# Altium PCB Fly-Balance.PcbDoc (part 1 of 2)
Units mil, origin at the board's own origin, x right, y up, seen from the top; angles counter-clockwise.
Board outline 1574.8 x 1574.8 mil, 2 copper layers (Top Layer, Bottom Layer); 114 components, 74 nets, 393 pads, 405 vias.
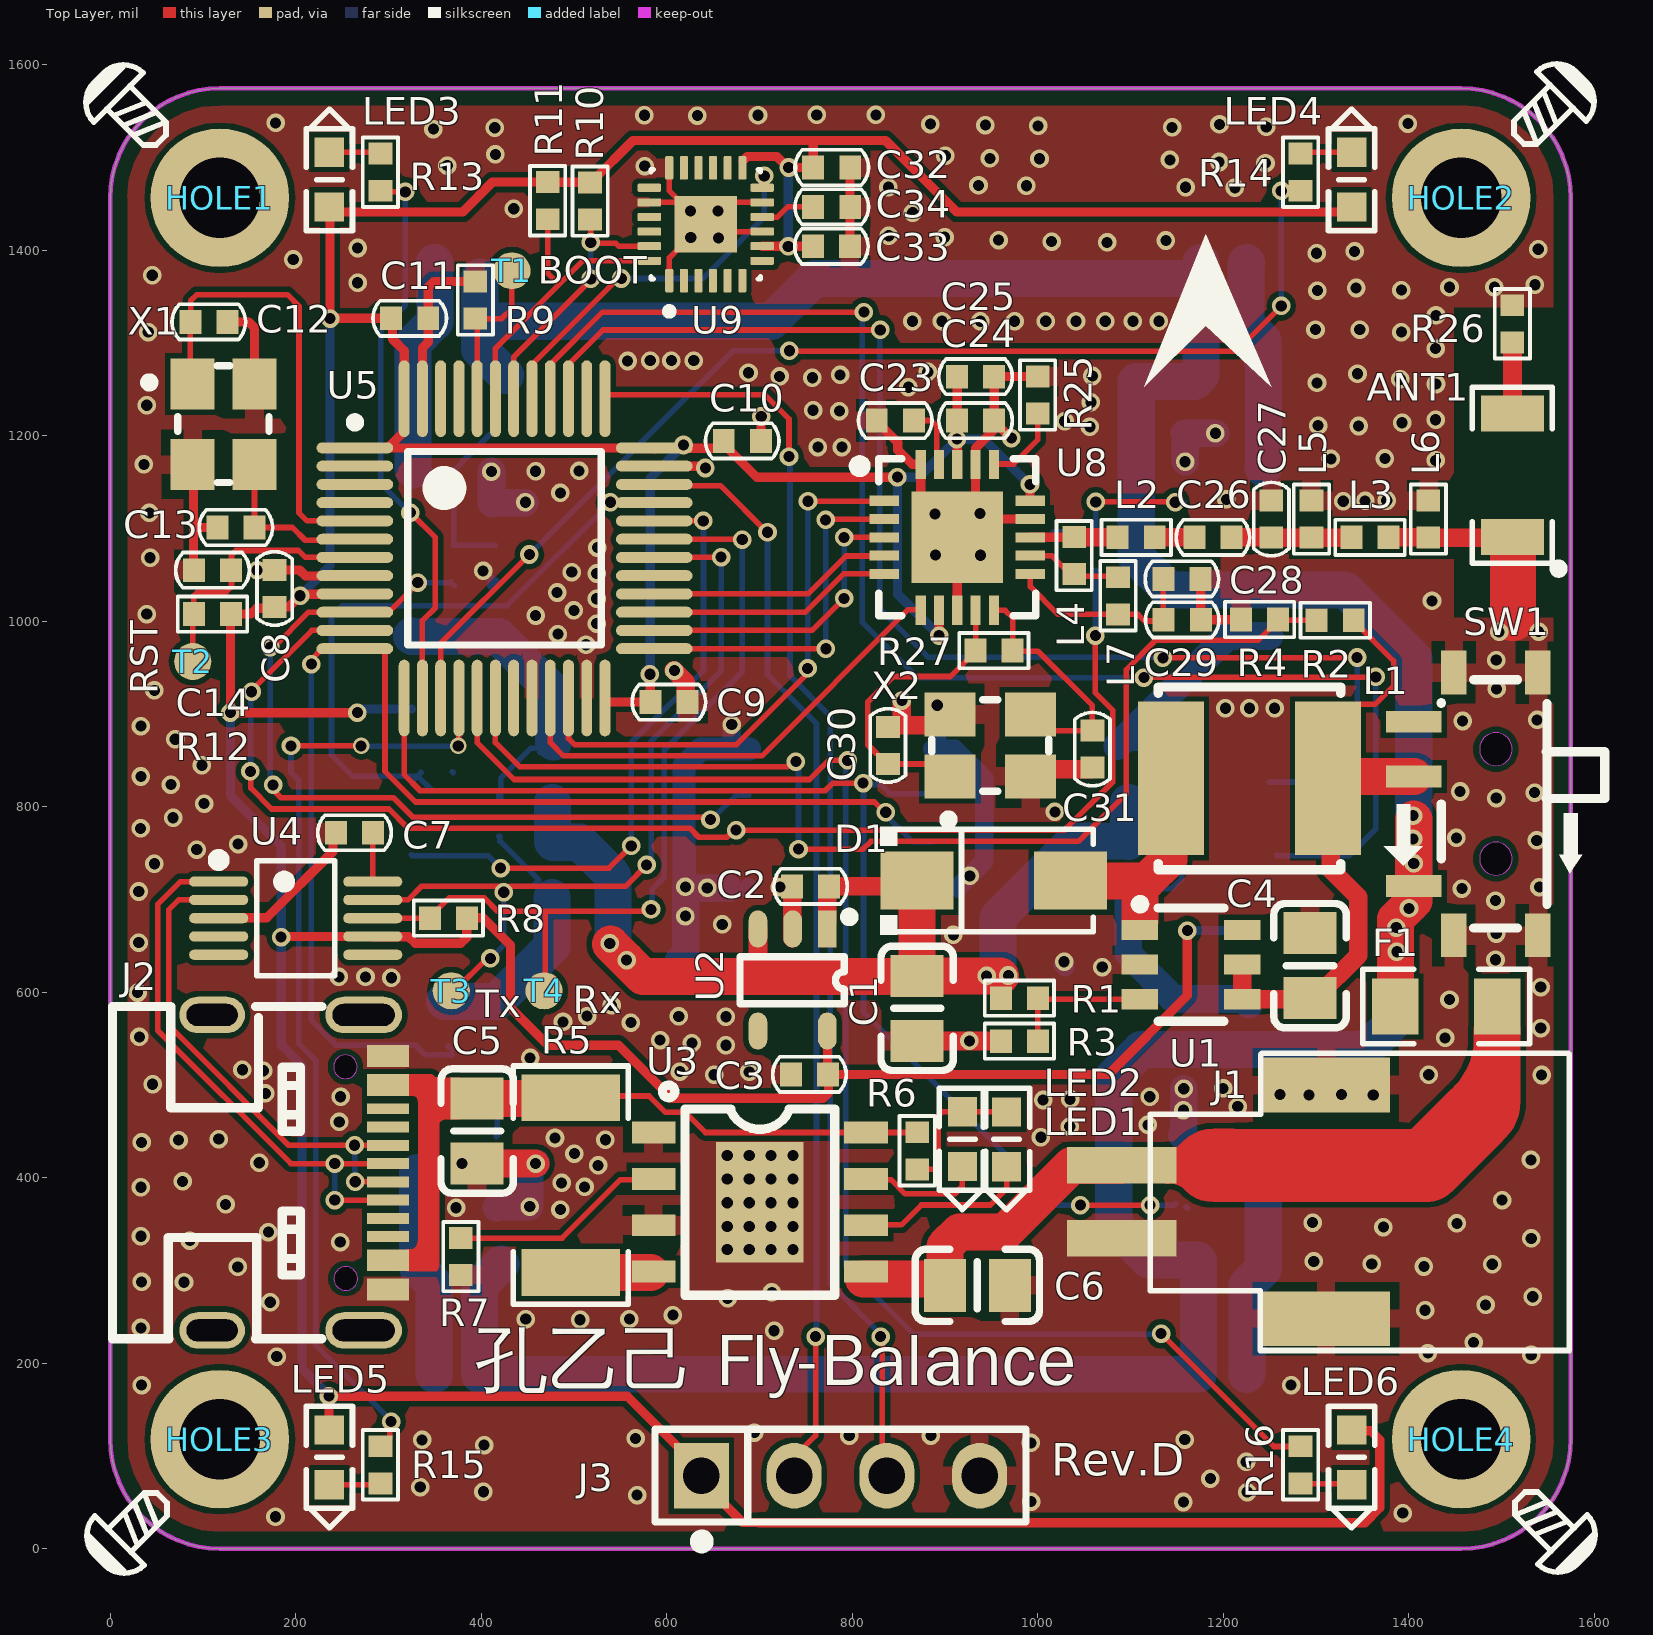
[diagram p0: Top Layer view]
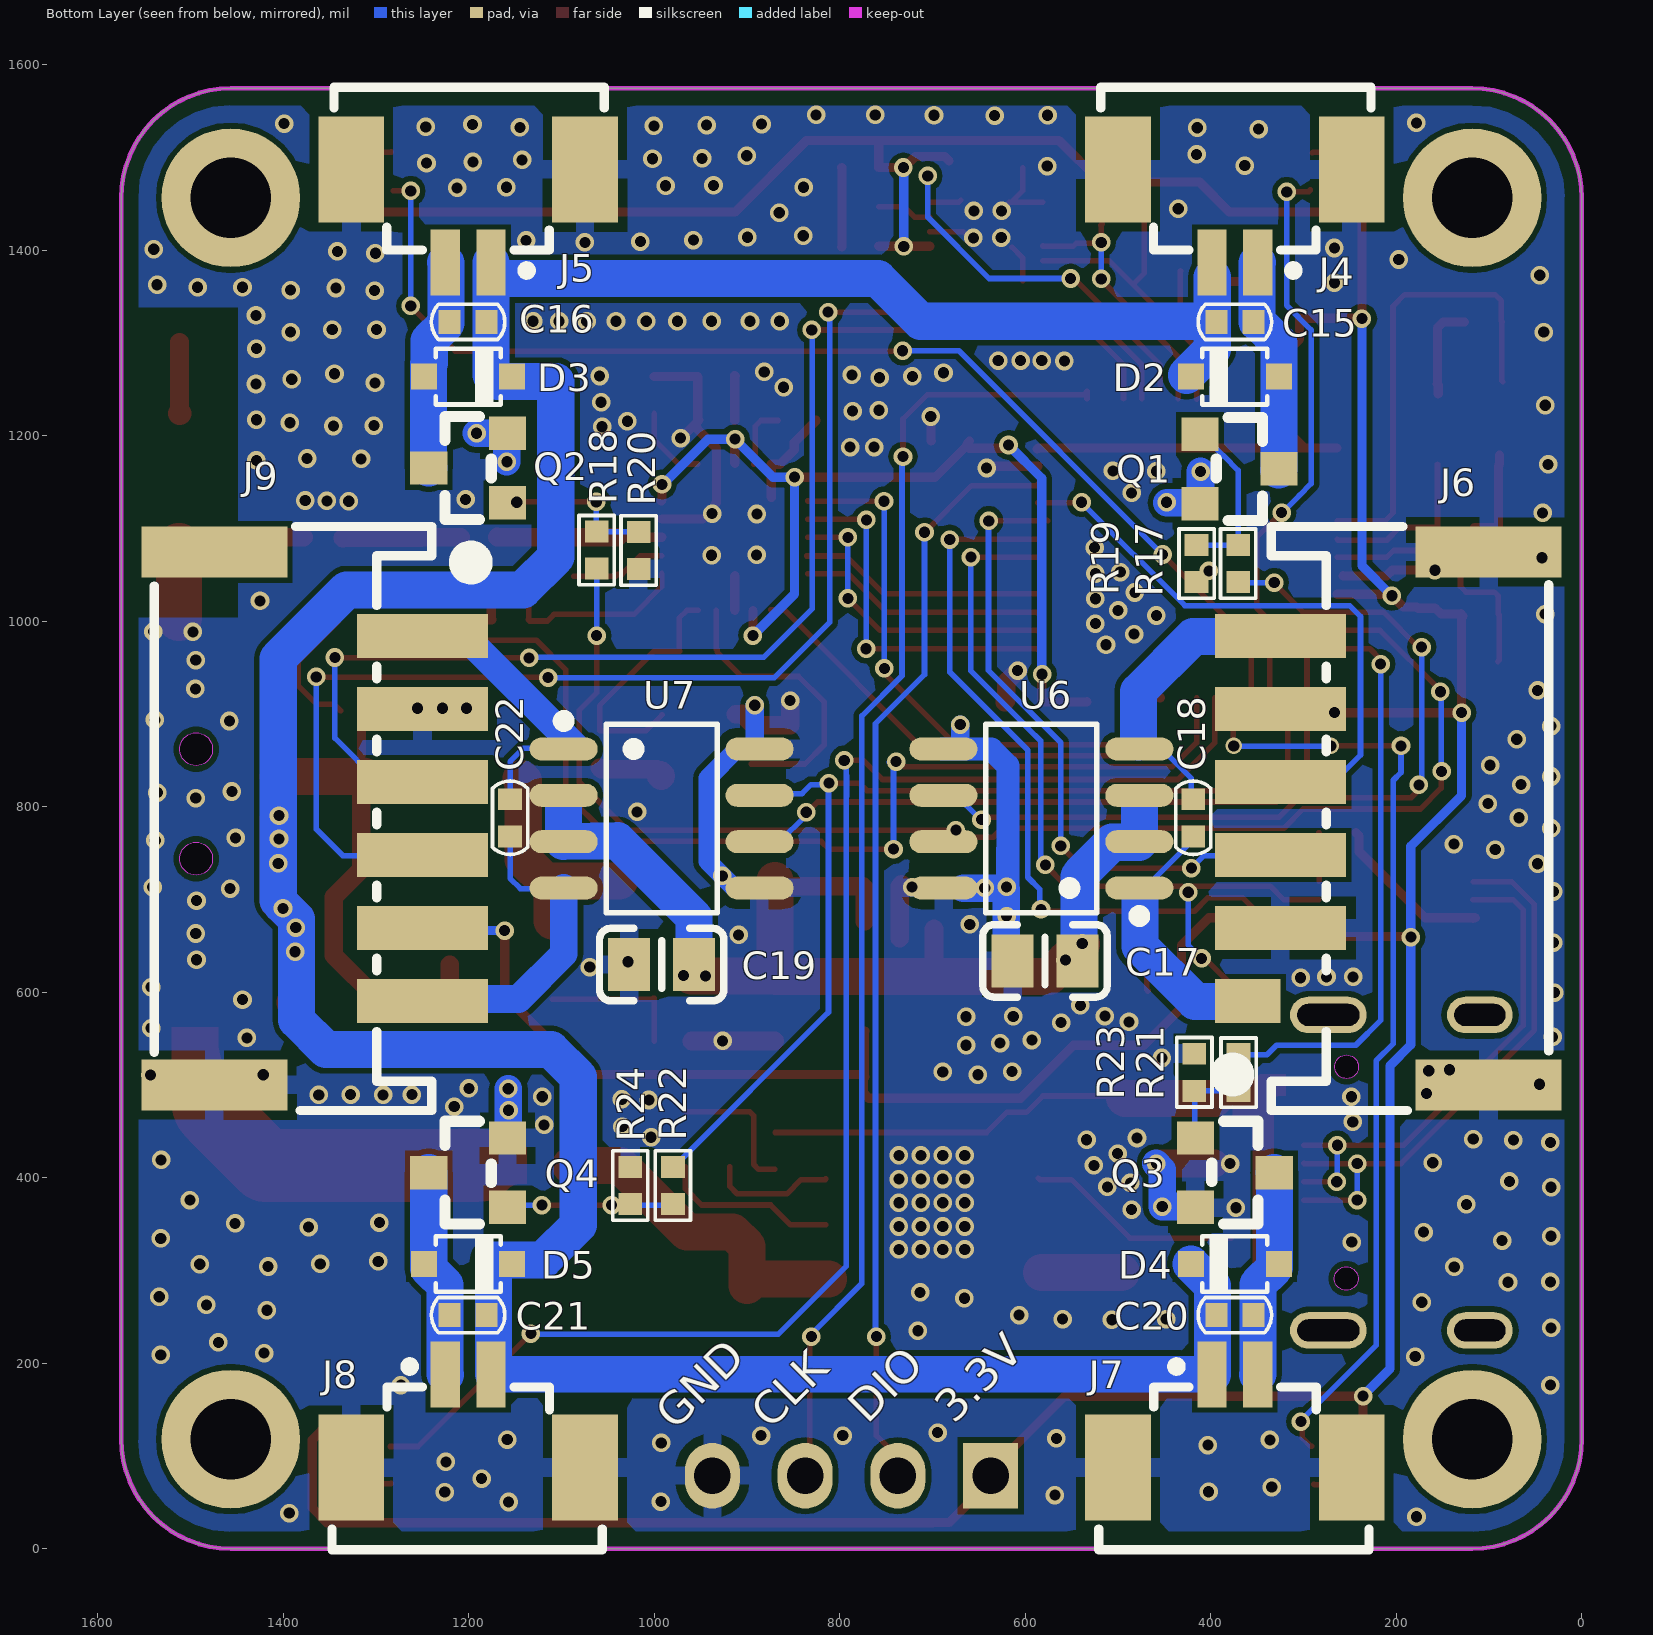
[diagram p1: Bottom Layer view, seen from below]

## Layer stack, top to bottom
Top Solder: solder mask 0.4, Solder Resist, Dk 3.5
Top Layer: signal copper 1.4
Dielectric 1: dielectric 12.6, FR-4, Dk 4.8
Bottom Layer: signal copper 1.4
Bottom Solder: solder mask 0.4, Solder Resist, Dk 3.5

## Board outline
0,118.11 ccw(c118.11,118.11) 118.11,0 1456.69,0 ccw(c1456.69,118.11) 1574.8,118.11 1574.8,1456.69 ccw(c1456.69,1456.69) 1456.69,1574.8 118.11,1574.8 ccw(c118.11,1456.69) 0,1456.69

## Design rules (kind name [scope] priority, off if disabled: settings)
Clearance Keep-Out [OnLayer('Keep-Out Layer')] p1: gap=15.75 ignorepadtopadclearanceinfootprint=FALSE except(0: Arc-Hole Track-Hole SMDPad-Hole THPad-Hole Via-Hole Fill-Hole Poly-Hole Region-Hole Text-Hole)
Clearance [All] p2: gap=6 ignorepadtopadclearanceinfootprint=FALSE except(0: Arc-Hole Track-Hole SMDPad-Hole THPad-Hole Via-Hole Fill-Hole Poly-Hole Region-Hole Text-Hole)
ComponentClearance [All] p1: gap=0 collisioncheckmode=3 verticalgap=0 showdistances=FALSE
HoleSize [All] p1: absolutevalues=TRUE maxlimit=200 minlimit=1 maxpercent=80.000 minpercent=20.000
MinimumSolderMaskSliver [All] p1: minsoldermaskwidth=0
PolygonConnect PolygonConnect_2 [HasPad('J2-A1B12') or HasPad('J2-B1A12') or HasPad('J1-1') or HasPad('R26-2') or HasPad('U3-9') or IsVia] p1: connectstyle=Direct reliefconductorwidth=10 reliefentries=4 polygonreliefangle="90 Angle" airgapwidth=10
PolygonConnect PolygonConnect_1 [All] p2: connectstyle=Relief reliefconductorwidth=20 reliefentries=4 polygonreliefangle="90 Angle" airgapwidth=10
RoutingVias [All] p1: holewidth=12 width=20 viastyle="Through Hole" minholewidth=12 minwidth=16 maxholewidth=28 maxwidth=50
SilkToSilkClearance [All] p1: silktosilkclearance=0
SilkToSolderMaskClearance [IsPad] p1: minsilkscreentomaskgap=0 clearancetoexposedcopper=TRUE
SolderMaskExpansion [All] p1: expansion=4
Width [All] p1: maxlimit=100 minlimit=6 preferedwidth=6
25 further rules are at their usual default settings.

## Classes and differential pairs
component class U_05_MPU6500: C32 C33 C34 U9
component class U_06_NRF24L01: ANT1 C23 C24 C25 C26 C27 C28 C29 C30 C31 L2 L3 L4 L5 L6 L7 R25 R26 R27 U8 X2
component class U_04_Motor_Driver: C15 C16 C17 C18 C19 C20 C21 C22 D2 D3 D4 D5 J4 J5 J6 J7 J8 J9 Q1 Q2 Q3 Q4 R17 R18 R19 R20 R21 R22 R23 R24 U6 U7
component class U_03_MCU: C8 C9 C10 C11 C12 C13 C14 J3 LED3 LED4 LED5 LED6 R9 R10 R11 R12 R13 R14 R15 R16 T1 T2 T3 T4 U5 X1
component class U_02_Power: C1 C2 C3 C4 C5 C6 C7 D1 F1 J1 J2 L1 LED1 LED2 R1 R2 R3 R4 R5 R6 R7 R8 SW1 U1 U2 U3 U4
component class 01_Fly-Balance: HOLE1 HOLE2 HOLE3 HOLE4

## Components (designator, comment, footprint, x,y, rotation, side; value= is the part's Value field where it differs from the comment)
ANT1 "CrossAir Antenna" ANT-SMD_L3.1-W1.6 1511.81,1157.48 r90 top
C1 "22uF" 0805C 870.08,582.68 r270 top
C2 "104" 0402C 755.12,714.17 r180 top
C3 "1uF" 0402C 753.94,511.42 r180 top
C4 "22uF" 0805C 1293.7,628.74 r90 top
C5 "10uF" 0805C 395.67,450.39 r270 top
C6 "10uF" 0805C 935,284 r0 top
C7 "104" 0402C 263.39,772.05 r180 top
C8 "104" 0402C 177.17,1035.43 r270 top
C9 "104" 0402C 602.36,912.99 r180 top
C10 "104" 0402C 681.5,1194.49 r180 top
C11 "104" 0402C 322.83,1326.77 r180 top
C12 "20pF" 0402C 106.3,1322.83 r180 top
C13 "20pF" 0402C 135.43,1101.18 r0 top
C14 "104" 0402C 110.24,1055.12 r0 top
C15 "104" 0402C 374.02,1322.83 r180 bottom
C16 "104" 0402C 1200.79,1322.83 r0 bottom
C17 "22uF" 0805C 578.74,633.86 r0 bottom
C18 "104" 0402C 418.9,788.19 r270 bottom
C19 "22uF" 0805C 992.13,629.92 r0 bottom
C20 "104" 0402C 374.02,251.97 r180 bottom
C21 "104" 0402C 1200.79,251.97 r0 bottom
C22 "104" 0402C 1155.51,788.19 r90 bottom
C23 "33nF" 0402C 846.46,1216.54 r0 top
C24 "10nF" 0402C 933.07,1216.54 r0 top
C25 "1nF" 0402C 933.07,1263.78 r0 top
C26 "1.5pF" 0402C 1188.98,1090.55 r0 top
C27 "1.0pF" 0402C 1251.97,1110.24 r270 top
C28 "2.2nF" 0402C 1155.51,1045.67 r0 top
C29 "4.7pF" 0402C 1155.91,1001.57 r0 top
C30 "20pF" 0402C 838.58,866.14 r270 top
C31 "20pF" 0402C 1059.06,862.2 r90 top
C32 "104" 0402C 777.95,1489.37 r0 top
C33 "10nF" 0402C 777.56,1404.33 r180 top
C34 "104" 0402C 777.95,1446.85 r0 top
D1 "SS24" SMA_L4.3-W2.5-LS5.0-RD 952.76,720.47 r180 top
D2 "1N4001" SOD-323 374.02,1263.78 r0 bottom
D3 "1N4001" SOD-323 1200.79,1263.78 r180 bottom
D4 "1N4001" SOD-323 374.02,307.09 r0 bottom
D5 "1N4001" SOD-323 1200.79,307.09 r180 bottom
F1 "5A" 1206R 1440.55,584.65 r0 top
HOLE1 "螺丝孔" HOLE-2.2 118.11,1456.69 r90 top
HOLE2 "螺丝孔" HOLE-2.2 1456.69,1456.69 r0 top
HOLE3 "螺丝孔" HOLE-2.2 118.11,118.11 r180 top
HOLE4 "螺丝孔" HOLE-2.2 1456.69,118.11 r270 top
J1 "Battery" 51005母座 1200.79,374.02 r90 top
J2 "Type-C" USB-C-SMD_TYPE-C-16P-1 204.72,405.51 r270 top
J3 "CON4" SIP-4-2.54 787.4,78.74 r0 top
J4 "FLY_MOT" CONN-SMD_2P-P1.25 374.02,1437.01 r0 bottom
J5 "FLY_MOT" CONN-SMD_2P-P1.25 1200.79,1437.01 r0 bottom
J6 "BAL_MOT" CONN-SMD_6P-P2.00_DEALON_PH-6PWB#1 212.6,787.4 r90 bottom
J7 "FLY_MOT" CONN-SMD_2P-P1.25 374.02,137.8 r180 bottom
J8 "FLY_MOT" CONN-SMD_2P-P1.25 1200.79,137.8 r180 bottom
J9 "BAL_MOT" CONN-SMD_6P-P2.00_DEALON_PH-6PWB#2 1362.2,787.4 r270 bottom
L1 "4.7uH" IND-SMD_L5.0-W5.0_FNR50XXS 1228.35,830.71 r180 top
L2 "3.9nH" 0402R 1106.3,1090.55 r0 top
L3 "3nH" 0402R 1358.27,1090.55 r0 top
L4 "8.2nH" 0402R 1039.37,1070.87 r90 top
L5 "NC" 0402R 1295.28,1110.24 r270 top
L6 "NC" 0402R 1421.26,1110.24 r270 top
L7 "2.7nH" 0402R 1086.61,1027.56 r270 top
LED1 "Green" LED-0603 966.54,441.34 r270 top value=0603Red,SMD
LED2 "Red" LED-0603 918.9,441.73 r270 top value=0603Red,SMD
LED3 "Blue" LED-0603 236.22,1476.38 r90 top value=0603Red,SMD
LED4 "Blue" LED-0603 1338.58,1476.38 r90 top value=0603Red,SMD
LED5 "Blue" LED-0603 236.22,98.43 r270 top value=0603Red,SMD
LED6 "Blue" LED-0603 1338.58,98.43 r270 top value=0603Red,SMD
Q1 "SI2302" SOT-23 369.09,1164.37 r180 bottom
Q2 "SI2302" SOT-23 1200.79,1165.35 r0 bottom
Q3 "SI2302" SOT-23 374.02,405.51 r180 bottom
Q4 "SI2302" SOT-23 1200.79,405.51 r0 bottom
R1 "18k" 0402R 980.32,593.7 r180 top
R2 "3.6k" 0402R 1320.87,1001.18 r0 top
R3 "2k" 0402R 980.32,547.24 r0 top
R4 "10k" 0402R 1239.29,1001.97 r0 top
R5 "200mΩ/750mW" 2010R 496.46,392.13 r90 top
R6 "1k" 0402R 870.08,429.13 r90 top
R7 "1k" 0402R 377.95,314.96 r90 top
R8 "10k" 0402R 364.57,679.92 r0 top
R9 "10k" 0402R 393.7,1346.46 r90 top
R10 "4.7k" 0402R 517.32,1453.15 r90 top
R11 "4.7k" 0402R 471.65,1453.54 r90 top
R12 "10k" 0402R 110.24,1007.87 r0 top
R13 "200" 0402R 291.34,1484.25 r90 top
R14 "200" 0402R 1283.46,1484.25 r90 top
R15 "200" 0402R 291.34,90.55 r270 top
R16 "200" 0402R 1283.46,90.55 r270 top
R17 "22" 0402R 370.47,1062.2 r270 bottom
R18 "22" 0402R 1062.2,1076.77 r270 bottom
R19 "10k" 0402R 415.35,1062.2 r270 bottom
R20 "10k" 0402R 1016.93,1076.38 r270 bottom
R21 "22" 0402R 370.08,513.39 r90 bottom
R22 "22" 0402R 979.92,391.73 r90 bottom
R23 "10k" 0402R 417.72,513.78 r90 bottom
R24 "10k" 0402R 1025.98,391.73 r90 bottom
R25 "22k" 0402R 1000,1244.09 r270 top
R26 "0" 0402R 1511.81,1320.87 r90 top
R27 "1M" 0402R 952.76,968.5 r0 top
SW1 "MSK12C02" MSK12C02 1472.44,803.15 r90 top
T1 "BOOT" PAD-40#1 433.07,1377.95 r0 top
T2 "RST" PAD-40#2 90.55,956.69 r0 top
T3 "Tx" PAD-40#1 367.72,601.57 r0 top
T4 "Rx" PAD-40#1 467.72,601.57 r0 top
U1 "ME2159BM6G" SOT-23-6_L2.9-W1.6-P0.95-LS2.8-BR 1165.35,629.92 r0 top
U2 "XC6204B332MR" SOT-23-5 735.83,613.27 r180 top
U3 "TP4056" ESOP-8_L4.9-W3.9-P1.27-LS6.0-BL-EP 700.46,373.82 r0 top
U4 "CH340E" MSOP-10_L3.0-W3.0-P0.50-LS5.0-BL 200,679.92 r270 top
U5 "CH32F203C8T6" LQFP-48_7x7 425.2,1078.74 r0 top
U6 "L9110S" SOP-8_L4.9-W3.9-P1.27-LS6.0-BL 582.68,787.4 r0 bottom
U7 "L9110S" SOP-8_L4.9-W3.9-P1.27-LS6.0-BL 992.13,787.4 r180 bottom
U8 "NRF24L01" QFN-20_L4.0-W4.0-P0.50-BL-EP 913.39,1090.55 r0 top
U9 "MPU6500" QFN-24_L3.0-W3.0-P0.40-BL-EP 642.13,1428.15 r90 top
X1 "8MHz" OSCCC250X320X80-4N 122.05,1212.6 r90 top
X2 "16MHz" OSCCC250X320X80-4N 948.82,866.14 r180 top

## Footprints (in the part's own frame and the unit in brackets; to place one, negate y for a bottom-side part, rotate by r counter-clockwise, add the part's x,y. Pads: shape width x height; smd on the part's side, far side on the other; paste and mask are expansions set on the pad)
0402C [mm]
  rect 0.6x0.65 smd mask+0.025: 1(-0.508,0) 2(0.508,0)
  silkscreen extent -1.01,-0.48 1.01,0.48, body extent -0.51,-0.23 0.49,0.27, height 0.5
0402R [mm]
  rect 0.6x0.65 smd mask+0.025: 1(-0.508,0) 2(0.508,0)
  silkscreen extent -0.95,-0.48 0.95,0.48, body extent -0.47,-0.25 0.53,0.25, height 0.35
0805C [mm]
  rect 1.15x1.45 smd: 1(-0.889,0) 2(0.889,0)
  silkscreen extent -1.7,-0.99 1.7,0.99, body extent -1,-0.63 1,0.63, height 0.78
1206R [mil] "元件 长X宽=120X60mil"
  rect 50x60 smd: 1(-55,0) 2(55,0)
  silkscreen extent -90,-40 90,40, body extent -63,-31 63,31, height 24
2010R [mm]
  rect 1.283x2.7 smd mask+0.051: 1(-2.391,0) 2(2.391,0)
  silkscreen extent -3.26,-1.58 3.26,1.58
51005母座 [mm]
  rect 1.5x3.5 smd: 0(-3.2,-2.8) 0(3.2,-2.8)
  rect 1x3 smd: 1(-1,2.8) 2(1,2.8)
  silkscreen extent -4.07,-9.46 4.07,2.02
ANT-SMD_L3.1-W1.6 [mil]
  rect 38.7x68 smd mask+2: 1(-66.6,0) 2(66.6,0)
  silkscreen extent -106,-55 95,43
CONN-SMD_2P-P1.25 [mil]
  rect 70.9x114.2 smd mask+1.97: 0(-126,-50.2) 0(126,-50.2)
  rect 31.5x70.9 smd mask+1.97: 1(-24.6,50.2) 2(24.6,50.2)
  silkscreen extent -147,-139 145,64
CONN-SMD_6P-P2.00_DEALON_PH-6PWB#1 [mm]
  rect 1.2x1.8 smd mask+0.05: 1(-5,3.75)
  rect 1.2x3.6 smd mask+0.05: 2(-3,2.85) 3(-1,2.85) 4(1,2.85) 5(3,2.85) 6(5,2.85)
  rect 1.4x4 smd mask+0.05: 7(-7.3,-2.85) 8(7.3,-2.85)
  silkscreen extent -8,-4.5 8,4.45
CONN-SMD_6P-P2.00_DEALON_PH-6PWB#2 [mm]
  rect 1.2x3.6 smd mask+0.05: 1(-5,2.85) 2(-3,2.85) 3(-1,2.85) 4(1,2.85) 5(3,2.85) 6(5,2.85)
  rect 1.4x4 smd mask+0.05: 7(-7.3,-2.85) 8(7.3,-2.85)
  silkscreen extent -8,-4.5 8,4.45
ESOP-8_L4.9-W3.9-P1.27-LS6.0-BL-EP [mm]
  rect 1.2x0.6 smd mask+0.051: 1(-2.908,1.905) 2(-2.908,0.635) 3(-2.908,-0.635) 4(-2.908,-1.905) 5(2.908,-1.905) 6(2.908,-0.635) 7(2.908,0.635) 8(2.908,1.905)
  rect 2.4x3.3 smd mask+0.051: 9(0,0)
  silkscreen extent -2.67,-2.55 2.05,3.2
HOLE-2.2 [mm]
  round 3.8 hole 2.2: 1(0,0)
  silkscreen extent 1.45,1.47 3.64,3.67
IND-SMD_L5.0-W5.0_FNR50XXS [mm]
  rect 1.8x4.2 smd mask+0.051: 1(-2.15,0) 2(2.15,0)
  silkscreen extent -2.5,-2.5 2.5,2.5
LED-0603 [mm] "20100324  贴片0603LED   LSB"
  rect 0.8x0.8 smd: 1(-0.75,0) 2(0.75,0)
  silkscreen extent -1.4,-0.64 1.93,0.64, body extent -0.8,-0.4 0.8,0.4, height 0.4
LQFP-48_7x7 [mm]
  oval 2.1x0.3 smd: 1(-4.1,2.75) 2(-4.1,2.25) 3(-4.1,1.75) 4(-4.1,1.25) 5(-4.1,0.75) 6(-4.1,0.25) 7(-4.1,-0.25) 8(-4.1,-0.75) 9(-4.1,-1.25) 10(-4.1,-1.75) 11(-4.1,-2.25) 12(-4.1,-2.75) 25(4.1,-2.75) 26(4.1,-2.25) 27(4.1,-1.75) 28(4.1,-1.25) 29(4.1,-0.75) 30(4.1,-0.25) 31(4.1,0.25) 32(4.1,0.75) 33(4.1,1.25) 34(4.1,1.75) 35(4.1,2.25) 36(4.1,2.75)
  oval 0.3x2.1 smd: 13(-2.75,-4.1) 14(-2.25,-4.1) 15(-1.75,-4.1) 16(-1.25,-4.1) 17(-0.75,-4.1) 18(-0.25,-4.1) 19(0.25,-4.1) 20(0.75,-4.1) 21(1.25,-4.1) 22(1.75,-4.1) 23(2.25,-4.1) 24(2.75,-4.1) 37(2.75,4.1) 38(2.25,4.1) 39(1.75,4.1) 40(1.25,4.1) 41(0.75,4.1) 42(0.25,4.1) 43(-0.25,4.1) 44(-0.75,4.1) 45(-1.25,4.1) 46(-1.75,4.1) 47(-2.25,4.1) 48(-2.75,4.1)
  silkscreen extent -4.22,-2.65 2.65,3.57, body extent -3.5,-3.5 3.5,3.5, height 1.6
MSK12C02 [mm]
  rect 1.2x0.7 smd mask+0.051: 0(-3.6,-1.7) 0(-3.6,0.6) 0(3.6,-1.7) 0(3.6,0.6)
  rect 0.6x1.524 smd mask+0.051: 1(-2.25,1.7) 2(0.75,1.7) 3(2.25,1.7)
  Keep-Out Layer board cut-out: 1.95,-0.55 1.906,-0.355 1.781,-0.198 1.6,-0.111 1.4,-0.111 1.22,-0.198 1.095,-0.355 1.05,-0.55 1.05,-0.55 1.095,-0.745 1.22,-0.902 1.4,-0.989 1.6,-0.989 1.781,-0.902 1.906,-0.745 1.95,-0.55
  Keep-Out Layer board cut-out: -1.05,-0.55 -1.094,-0.355 -1.219,-0.198 -1.4,-0.111 -1.6,-0.111 -1.78,-0.198 -1.905,-0.355 -1.95,-0.55 -1.95,-0.55 -1.905,-0.745 -1.78,-0.902 -1.6,-0.989 -1.4,-0.989 -1.219,-0.902 -1.094,-0.745 -1.05,-0.55
  silkscreen extent -3.4,-3.53 3.4,0.95
MSOP-10_L3.0-W3.0-P0.50-LS5.0-BL [mil]
  oval 11x63.8 smd mask+2: 1(-39.4,-83.1) 2(-19.7,-83.1) 3(0,-83.1) 4(19.7,-83.1) 5(39.4,-83.1) 6(39.4,83.1) 7(19.7,83.1) 8(0,83.1) 9(-19.7,83.1) 10(-39.4,83.1)
  silkscreen extent -69,-89 62,42
OSCCC250X320X80-4N [mm]
  rect 1.4x1.2 smd: 1(1.1,0.85) 2(-1.1,0.85) 3(-1.1,-0.85) 4(1.1,-0.85)
  silkscreen extent -1.6,-1.25 1.6,2.16
PAD-40#1 [mil]
  round 40 smd paste-43.31: 1(0,0)
PAD-40#2 [mil]
  round 40 smd paste-43.31: 1(-1.57,0)
QFN-20_L4.0-W4.0-P0.50-BL-EP [mil]
  rect 31.5x11 smd mask+2: 1(-78.7,39.4) 2(-78.7,19.7) 3(-78.7,0) 4(-78.7,-19.7) 5(-78.7,-39.4) 11(78.7,-39.4) 12(78.7,-19.7) 13(78.7,0) 14(78.7,19.7) 15(78.7,39.4)
  rect 11x31.5 smd mask+2: 6(-39.4,-78.7) 7(-19.7,-78.7) 8(0,-78.7) 9(19.7,-78.7) 10(39.4,-78.7) 16(39.4,78.7) 17(19.7,78.7) 18(0,78.7) 19(-19.7,78.7) 20(-39.4,78.7)
  rect 98.4x98.4 smd mask+2: 21(0,0)
  silkscreen extent -111,-85 85,85
QFN-24_L3.0-W3.0-P0.40-BL-EP [mm]
  rrect25% 0.64x0.22 smd: 1(-1.545,1) 2(-1.545,0.6) 3(-1.545,0.2) 4(-1.545,-0.2) 5(-1.545,-0.6) 6(-1.545,-1) 13(1.545,-1) 14(1.545,-0.6) 15(1.545,-0.2) 16(1.545,0.2) 17(1.545,0.6) 18(1.545,1)
  rrect25% 0.22x0.64 smd: 7(-1,-1.545) 8(-0.6,-1.545) 9(-0.2,-1.545) 10(0.2,-1.545) 11(0.6,-1.545) 12(1,-1.545) 19(1,1.545) 20(0.6,1.545) 21(0.2,1.545) 22(-0.2,1.545) 23(-0.6,1.545) 24(-1,1.545)
  rect 1.54x1.7 smd paste-2: 25(0,0)
  silkscreen extent -2.48,-1.5 1.5,1.5
SIP-4-2.54 [mm]
  rect 1.5x1.8 hole 1: 1(-3.81,0)
  oval 1.5x1.8 hole 1: 2(-1.27,0) 3(1.27,0) 4(3.81,0)
  silkscreen extent -5.08,-1.92 5.08,1.27, body extent -5.08,-1.27 5.08,1.27, height 7.58
SMA_L4.3-W2.5-LS5.0-RD [mm]
  rect 2x1.593 smd mask+0.051: 1(-2.1,0) 2(2.1,0)
  silkscreen extent -2.73,-1.48 3.11,1.48
SOD-323 [mil]
  rect 28x28 smd: 1(-47.5,0) 2(47.5,0)
  silkscreen extent -35,-30 35,30, body extent -51,-26 51,25, height 39
SOP-8_L4.9-W3.9-P1.27-LS6.0-BL [mm]
  oval 1.865x0.63 smd mask+0.051: 1(-2.682,1.905) 2(-2.682,0.635) 3(-2.682,-0.635) 4(-2.682,-1.905) 5(2.682,-1.905) 6(2.682,-0.635) 7(2.682,0.635) 8(2.682,1.905)
  silkscreen extent -2.83,-2.58 1.52,2.82
SOT-23 [mil]
  rect 40x36 smd: 1(-42.5,37.4) 2(-42.5,-37.4) 3(42.5,0)
  silkscreen extent -25,-56 25,56, body extent -47,-57 50,58, height 39
SOT-23-5 [mil]
  rect 20x40 smd: 1(-37.4,-55)
  oval 20x40 smd: 2(0,-55) 3(37.4,-55) 4(37.4,55) 5(-37.4,55)
  silkscreen extent -66,-73 57,26, body extent -57,-55 57,55, height 43
SOT-23-6_L2.9-W1.6-P0.95-LS2.8-BR [mm]
  rect 1x0.55 smd mask+0.051: 1(-1.4,0.95) 2(-1.4,0) 3(-1.4,-0.95) 4(1.4,-0.95) 5(1.4,0) 6(1.4,0.95)
  silkscreen extent -1.52,-1.55 0.9,1.78
USB-C-SMD_TYPE-C-16P-1 [mm]
  rect 0.6x1.15 smd mask+0.05: A1B12(-3.2,2.41) A4B9(-2.4,2.41) B1A12(3.2,2.41) B4A9(2.4,2.41)
  rect 0.3x1.15 smd mask+0.05: A5(-1.25,2.41) A6(-0.25,2.41) A7(0.25,2.41) A8(1.25,2.41) B5(1.75,2.41) B6(0.75,2.41) B7(-0.75,2.41) B8(-1.75,2.41)
  oval 1x2.1 hole 0.6 slot 1.7 at 90 deg mask+0.05: EP(-4.32,1.74) EP(4.32,1.74)
  oval 1x1.8 hole 0.6 slot 1.4 at 90 deg mask+0.05: EP(-4.32,-2.41) EP(4.32,-2.41)
  Keep-Out Layer board cut-out: 3.225,1.25 3.193,1.391 3.103,1.504 2.972,1.567 2.828,1.567 2.697,1.504 2.607,1.391 2.575,1.25 2.575,1.25 2.607,1.109 2.697,0.996 2.828,0.933 2.972,0.933 3.103,0.996 3.193,1.109 3.225,1.25
  Keep-Out Layer board cut-out: -2.575,1.24 -2.607,1.381 -2.697,1.494 -2.828,1.557 -2.972,1.557 -3.103,1.494 -3.193,1.381 -3.225,1.24 -3.225,1.24 -3.193,1.099 -3.103,0.986 -2.972,0.923 -2.828,0.923 -2.697,0.986 -2.607,1.099 -2.575,1.24
  silkscreen extent -4.55,-5.14 4.55,0.59

## Part data
ANT1: library part CON2, "Connector"
C1 C2 C3 C4 C5 C6 C7 C8 C9 C10 C11 C12 C13 C14 C15 C16 C17 C18 C19 C20 C21 C22 C23 C24 C25 C26 C27 C28 C29 C30 C31 C32 C33 C34: "电容"
D1 D2 D3 D4 D5: "二极管"
F1: "保险丝"
HOLE1 HOLE2 HOLE3 HOLE4: library part "HOLE - 螺丝孔"
J1 J4 J5 J7 J8: library part CON, "直流电机接口"
J3: "Connector"
J6 J9: library part CON8, "Connector"
L1 L2 L3 L4 L5 L6 L7: "电感"
LED1 LED2 LED3 LED4 LED5 LED6: "发光二极管"
Q1 Q2 Q3 Q4: "N-MOSFET"
R1 R2 R3 R4 R5 R6 R7 R8 R9 R10 R11 R12 R13 R14 R15 R16 R17 R18 R19 R20 R21 R22 R23 R24 R25 R26 R27: "电阻"
SW1: library part 单刀双掷开关
T1 T2 T3 T4: library part TEST-DOT, "测试点"
U1: "DC-DC升压芯片"
U2: "LDO, 3.0V输出"
U3: library part 4056, "单节锂电池充电芯片"
U4: "USB-TTLоƬ"
U5: library part STM32F103C, "STM32单片机48引脚"
U6 U7: "H桥电机驱动芯片"
U8: "2.4G无线通信芯片"
U9: "三轴加速度计和三轴陀螺仪"
X1 X2: "4pin贴片无源晶振"

## Via types
v1: diameter 20, hole 12, Top Layer to Bottom Layer, tented both sides, 403 vias
v2: diameter 18, hole 12, Top Layer to Bottom Layer, tented both sides, 2 vias

## Nets (pads, with @x,y where several pads share a name; then routed paths per layer and width w, separated by ;. In a path a pad name is that pad's centre, name@x,y a point inside that pad or via, vN(x,y) a via of type N, cw(c..) or ccw(c..) an arc to the next point about the centre after c; other vN are vias at no path point)
3.3V: C3.1 C8.2 C9.2 C10.2 C11.2 C24.1 C25.1 C32.1 C33.2 J3.1 J6.5 J9.5 LED3.1 LED4.1 LED5.1 LED6.1 R8.2 R10.2 R11.2 R12.2 U2.5 U4.7 U5.1 U5.9 U5.24 U5.36 U5.48 U8.7 U8.15 U8.18 U9.8 U9.13 | length 7452.7
  Top Layer w10: v1@128.35,901.57 v1(129.53,901.57) ; R12.2@130.24,1007.87 127.95,1005.59 129.53,1004.02 v1(129.53,901.57) ; R12.2@130.32,1008.27 130.32,1007.87 151.57,1007.87 157.87,1014.17 176.38,1014.17 177.56,1015.35 192.52,1015.35 201.18,1024.02 v1@208.27,1024.02 ; v1@184.65,660.23 U4.7@283.1,660.22 283.29,660.03 321.47,660.03 328.74,652.76 377.95,652.76 384.25,659.06 384.25,679.53 R8.2@384.57,679.92 ; v1@213.43,1029.18 263.43,1029.18 U5.9@263.78,1029.53 ; LED5.1@235.04,125.59 235.83,126.38 v1(235.83,164.57) 557.48,164.57 637.4,84.65 J3.1@637.4,78.74 ; LED3.1@236.22,1446.85 LED3.1@237.01,1446.06 ; LED5.1@237.4,127.95 LED5.1@237.4,129.13 ; U5.1@263.78,1187.01 U5.1@299.21,1187.01 ; U5.1@264.96,1187.01 U5.1@299.21,1187.01 ; v1(266.54,901.57) v1(129.53,901.57) ; 276.77,1326.77 C11.2@302.83,1326.77 ; 277.95,1326.77 237.4,1326.77 v1(237.01,1326.38) LED3.1@237.01,1446.06 ; C11.2@303.15,1326.38 304.33,1325.2 304.33,1304.33 316.93,1291.73 U5.48@316.93,1240.16 316.93,1204.72 U5.1@299.21,1187.01 ; R8.2@385.83,680.32 401.97,680.32 431.5,650.79 431.5,583.46 472.05,542.91 548.03,542.91 605.12,485.83 768.9,485.83 774.41,491.34 774.41,510.94 C3.1@773.94,511.42 1076.38,511.42 1161.42,596.46 v1(1161.42,666.54) ; R11.2@468.11,1472.05 466.54,1473.62 412.2,1473.62 380.02,1441.44 241.63,1441.44 LED3.1@237.01,1446.06 ; R11.2@471.65,1473.54 471.85,1473.35 R10.2@516.42,1473.35 ; R10.2@517.32,1474.41 519.57,1474.41 563.66,1518.5 835.83,1518.5 912.89,1441.44 1333.17,1441.44 LED4.1@1338.58,1446.85 ; U5.24@533.46,913.39 533.86,912.99 C9.2@582.36,912.99 582.13,913.23 582.13,942.68 v1(581.89,942.91) ; U5.36@587.01,1185.83 585.83,1187.01 U5.1@299.21,1187.01 ; U5.36@618.11,1186.66 C10.2@660.24,1186.66 ; J3.1@636.61,78.74 636.61,73.62 682.01,28.22 699.09,28.22 699.17,28.14 1352.95,28.14 1368.9,44.09 1368.9,117.32 1359.06,127.17 1339.76,127.17 LED6.1@1339.37,127.56 ; C10.2@660.24,1194.09 662.73,1191.6 662.73,1190.02 697.24,1155.51 v1(848.82,1155.51) ; U9.13@682.17,1496.58 686.91,1501.32 718.76,1501.32 731.1,1488.98 v1@731.5,1488.98 ; U9.8@702.95,1404.53 v1@726.57,1404.53 ; v1@728.74,1408.27 731.1,1405.91 v1(731.1,1404.33) 757.48,1404.33 C33.2@757.87,1404.72 ; v1(731.49,1489.37) C32.1@757.48,1489.37 ; 757.09,1517.72 757.95,1516.85 C32.1@757.95,1489.37 ; C3.1@772.83,509.06 773.39,509.61 773.39,558.11 U2.5@773.23,558.27 ; v1(893.7,984.65) U8.7@893.69,1011.41 ; C25.1@912.6,1264.17 C25.1@913.49,1265.06 ; U8.18@912.99,1170.47 913.23,1170.71 913.23,1196.22 v1(912.99,1196.46) ; C25.1@913.07,1263.78 913.23,1263.62 C24.1@913.23,1216.54 ; v1(991.73,1147.64) 991.73,1130.45 992.26,1129.92 U8.15@992.52,1129.92
  Bottom Layer w10: v1(129.53,901.57) 129.53,812.2 184.25,757.48 v1(184.25,659.45) 184.25,543.31 206.69,520.87 206.69,194.09 235.83,164.96 v1(235.83,164.57) ; v1(204.72,1027.56) 237.01,1059.84 v1(237.01,1326.38) ; v1(266.54,901.57) 266.54,903.54 268.5,905.51 J6.5@324.8,905.51 ; v1(581.89,942.91) 582.28,943.31 582.28,1154.33 v1(618.11,1190.16) ; v1(731.1,1404.33) 731.1,1488.97 v1(731.49,1489.37) ; v1@894.09,984.65 v1(893.7,984.65) 848.82,1029.53 v1(848.82,1155.51) 872.05,1155.51 v1(912.99,1196.46) 942.13,1196.46 990.94,1147.64 v1(991.73,1147.64) ; v1(1161.42,666.54) 1232.68,666.54 J9.5@1233.07,666.93
6V: C1.1 C2.1 C17.1 C19.1 D1.2 R1.2 U2.1 U2.3 U6.2 U6.3 U7.2 U7.3 | length 1189.1
  Top Layer w20: 696.85,622.05 698.43,623.62 U2.3@698.43,668.27 ; U2.1@773.23,676.38 773.23,707.68 773.31,707.76 773.31,712.36 C2.1@775.12,714.17 ; C2.1@775.59,714.17 863.78,714.17 D1.2@870.08,720.47
  Top Layer w40: v1@539.37,651.97 v1(556.69,634.65) 574.41,616.93 869.33,616.93 C1.1@870.08,617.68 ; D1.2@870.08,720.47 C1.1@870.08,617.68 ; v1@959.84,617.68 C1.1@870.08,617.68
  Bottom Layer w40: U6.3@477.07,804.8 U6.2@477.07,762.4 477.66,761.81 506.28,761.81 539.78,728.31 ; C17.1@542.13,652.36 542.13,724.8 ; C19.1@957.09,621.26 957.09,680.71 1039.76,763.39 U7.3@1097.74,762.4 U7.2@1097.74,804.8
  other v1: 944.88,617.72 968.5,618.11 538.58,652.76
ADC_BATT: R2.1 R4.2 U5.18 | length 1227.5
  Top Layer w6: U5.18@415.35,917.32 415.35,869.3 441.67,842.98 730.39,842.98 736.22,848.82 v1(739.37,848.82) ; v1(742.13,754.33) 811.63,754.33 820.11,762.8 1043.91,762.8 1050.39,769.29 ; 1050.79,769.69 1095.57,814.46 1095.57,948.03 1127.32,979.78 1238.09,979.78 R4.2@1259.45,1001.14 ; R4.2@1259.06,1001.18 1259.45,1001.18 R2.1@1300.87,1001.18
  Bottom Layer w6: v1(742.13,754.33) 742.13,846.06 v1(739.37,848.82) 745.67,848.82 v1@746.46,848.03
BAL_MOT_L_A: J6.3 U5.32 | length 687.7
  Top Layer w6: v1(420.87,733.86) 537.8,733.86 v1(561.81,757.87) ; U5.32@575.98,1108.27 U5.32@576.77,1109.06 ; U5.32@588.58,1108.66 588.98,1108.27 v1(639.37,1108.27)
  Bottom Layer w6: J6.3@324.8,748.03 325.46,747.38 407.35,747.38 v1(420.87,733.86) ; v1(561.81,757.87) 561.81,869.29 568.11,875.59 639.66,947.14 639.66,1107.98 v1(639.37,1108.27)
BAL_MOT_L_B: J6.4 U5.33 | length 707.1
  Top Layer w6: v1@533.07,1128.34 v1(539.37,1128.34) ; v1@533.66,1127.76 586.42,1127.76 U5.33@586.61,1127.95
  Bottom Layer w6: J6.4@324.8,826.77 J6.4@331.3,833.27 ; J6.4@335.04,837.01 J6.4@331.3,833.27 ; J6.4@347.24,817.32 J6.4@331.3,833.27 ; J6.4@368.9,837.8 J6.4@369.69,837.01 ; 427.95,1016.87 250.21,1016.87 238.58,1005.25 238.58,855.91 261.42,833.07 331.1,833.07 J6.4@331.3,833.27 ; 427.95,1016.93 v1(539.37,1128.34) v1@539.37,1122.05
BAL_MOT_L_M+: C18.2 J6.1 U6.1 | length 266.4
  Bottom Layer w6: C18.2@418.9,768.19 419.88,768.19 420.08,767.99 420.08,762.99 462.2,720.87 U6.1@457.09,715.75
  Bottom Layer w40: J6.1@360.24,590.55 360.63,590.16 416.93,590.16 476.38,649.61 U6.1@476.38,701.97
BAL_MOT_L_M-: C18.1 J6.6 U6.4 | length 319.8
  Bottom Layer w6: C18.1@418.9,814.96 C18.1@418.9,808.19 419.88,808.19 421.26,809.57 421.26,830.91 453.74,863.39 U6.4@461.02,863.39 ; U6.4@462.99,859.06 U6.4@462.99,862.2
  Bottom Layer w40: J6.6@324.8,984.25 325.59,983.46 418.9,983.46 477.95,924.41 U6.4@477.95,870
BAL_MOT_LA: R17.2 U5.10 U6.6 | length 941.1
  Top Layer w6: v1(172.59,972.29) 176.33,972.29 213.88,1009.84 U5.10@263.78,1009.84 300.61,1009.84 331.5,1040.73 v1(331.5,1041.73) ; v1(175.59,823.62) 170.08,823.62 183.86,809.84 305.16,809.84 326.13,788.87 646.56,788.87 v1@648.82,786.61
  Bottom Layer w6: v1(172.59,972.29) 172.59,826.62 v1(175.59,823.62) ; v1(331.5,1041.73) 366.14,1041.73 366.93,1042.52 R17.2@371.26,1038.19 ; v1(647.24,786.22) 647.24,785.43 651.57,781.1 651.57,789.37 674.61,812.4 U6.6@688.29,812.4
BAL_MOT_LB: R18.2 U5.11 U6.7 | length 1459.2
  Top Layer w6: v1@150.79,838.19 151.57,837.4 151.57,820.08 174.02,797.64 300.39,797.64 321.16,776.87 624.91,776.87 634.56,767.22 664.86,767.22 669.76,772.12 670.94,772.12 v1@674.41,775.59 ; v1(152.36,924.01) 154.63,924.01 152.9,925.74 217.32,990.16 U5.11@263.78,990.16 ; v1(674.8,774.8) 1029.13,774.8 1080.85,826.52 1080.85,904.23 1062.2,922.88 v1(1062.2,984.65)
  Bottom Layer w6: v1(151.18,838.19) 151.57,838.58 151.57,923.23 v1(152.36,924.01) ; v1(1062.2,984.65) 1062.2,1054.72 R18.2@1062.6,1055.12
BAL_MOT_R_A: J9.3 U5.39 | length 1430.2
  Top Layer w6: U5.39@494.09,1240.16 494.09,1276.99 531.28,1314.17 v1(830.31,1314.17) ; v1@1133.07,960.63 1344.09,960.63 v1(1344.49,961.02)
  Bottom Layer w6: v1(830.31,1314.17) 829.82,1313.68 829.82,1013.49 881.89,961.42 v1@1134.25,961.42 ; v1@1133.75,961.91 v1@1134.25,961.42 ; v1@1134.65,961.42 v1@1134.25,961.42 ; v1(1135.04,960.63) v1@1134.25,961.42 ; J9.3@1250,826.77 1297.24,826.77 1344.49,874.02 v1(1344.49,961.02)
BAL_MOT_R_B: J9.4 U5.40 | length 1595.5
  Top Layer w6: U5.40@474.41,1240.16 474.41,1276.99 530.89,1333.46 v1(812.6,1333.46) ; v1(1114.57,939.37) 1114.96,939.76 1364.17,939.76 v1(1364.57,940.16)
  Bottom Layer w6: v1(812.6,1333.46) 810.92,1331.79 810.92,998.92 870.87,938.98 1114.17,938.98 v1(1114.57,939.37) ; J9.4@1257.87,747.64 1258.27,747.24 1335.83,747.24 1364.57,775.98 v1(1364.57,940.16)
BAL_MOT_R_M+: C22.2 J9.1 U7.1 | length 318
  Bottom Layer w6: U7.1@1097.64,863.39 1140.94,863.39 1155.51,848.82 C22.2@1155.51,808.19
  Bottom Layer w30: U7.1@1085.74,865.44 1204.55,984.25 J9.1@1250,984.25
BAL_MOT_R_M-: C22.1 J9.6 U7.4 | length 329.3
  Bottom Layer w6: U7.4@1100.39,713.39 1101.97,711.81 1144.49,711.81 1155.51,722.83 C22.1@1155.51,768.19
  Bottom Layer w30: U7.4@1097.74,712.4 1097.74,641.63 1146.46,592.91 1222.05,592.91 J9.6@1227.95,587.01
BAL_MOT_RA: R21.2 U5.12 U7.6 | length 1368.2
  Top Layer w6: v1(216.93,953.94) 216.93,959.06 228.35,970.47 U5.12@263.78,970.47 ; U5.12@297.24,970.47 296.21,969.44 296.21,838.23 329.22,805.22 823.92,805.22 v1@836.61,792.52
  Bottom Layer w6: v1(216.93,953.94) 216.93,569.67 243.69,542.91 329.13,542.91 339.37,532.68 R21.2@368.9,532.68 ; R21.2@363.71,542.2 R21.2@368.11,537.8 ; v1@836.61,790.85 865.06,762.4 U7.6@886.52,762.4
  other v1: 836.22,794.09
BAL_MOT_RB: R22.2 U5.13 U7.7 | length 1150.9
  Top Layer w6: U5.13@316.93,917.32 316.93,834.63 334.24,817.32 770.87,817.32 779.13,825.59 811.02,825.59 v1@811.81,826.38
  Bottom Layer w6: v1(811.81,825.59) v1@812.2,825.19 ; U7.7@886.52,812.4 884.6,814.31 840.8,814.31 831.1,824.02 813.39,824.02 v1@812.2,825.2 ; R22.2@979.13,412.99 977.68,412.99 813.11,577.56 812.99,577.56 812.2,578.35 v1@812.2,825.19
BOOT: R9.1 T1.1 U5.44 | length 172.7
  Top Layer w6: R9.1@393.31,1327.56 394.41,1326.46 R9.1@393.7,1326.46 ; U5.44@395.67,1240.16 395.67,1325.2 394.49,1326.38 422.05,1326.38 ; 422.13,1326.46 433.07,1337.4 433.07,1377.56 T1.1@432.68,1377.95